# Altium PCB LP_ECG-X01.PcbDoc (part 1 of 4)
Units mm, origin at the board's own origin, x right, y up, seen from the top; angles counter-clockwise.
Board outline 54.86 x 17.53 mm, 2 copper layers (Top Layer, Bottom Layer), stack 0.141 mm thick; 98 components, 68 nets, 322 pads, 93 vias.
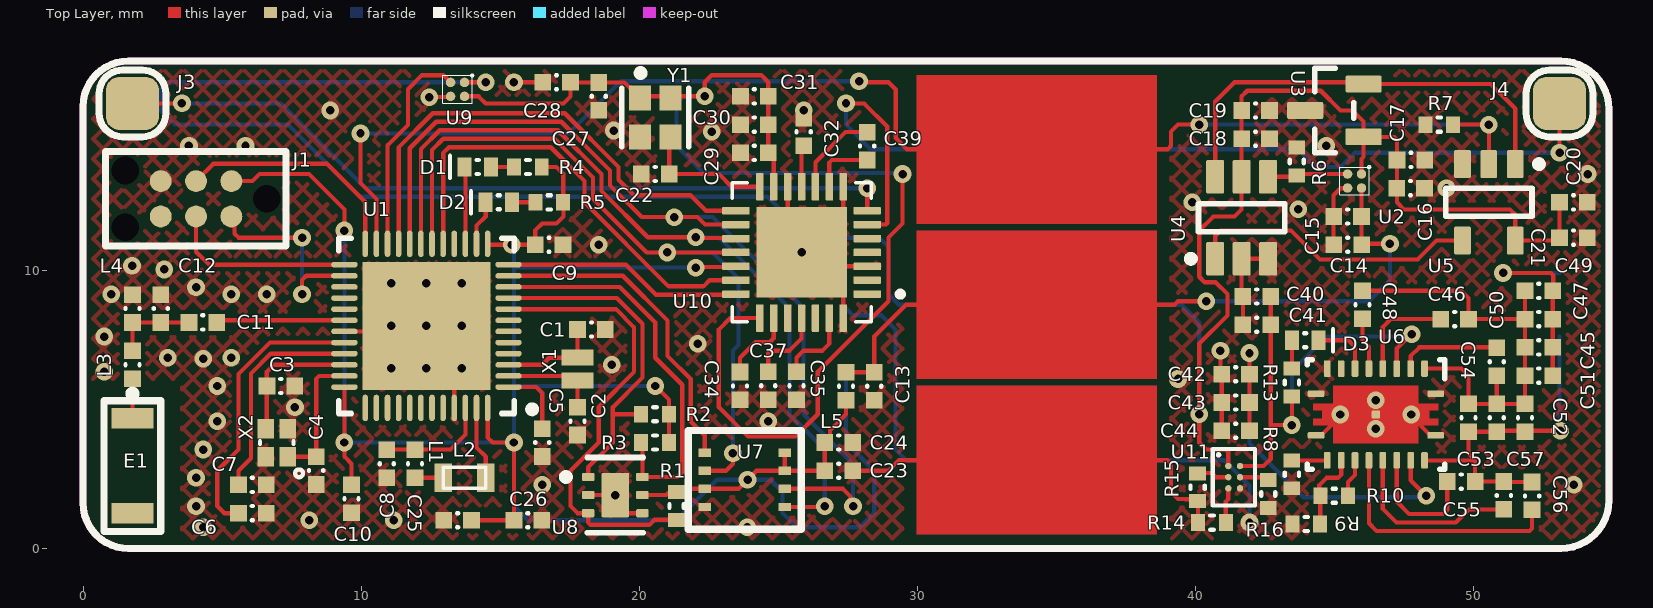
[diagram p0: Top Layer view]
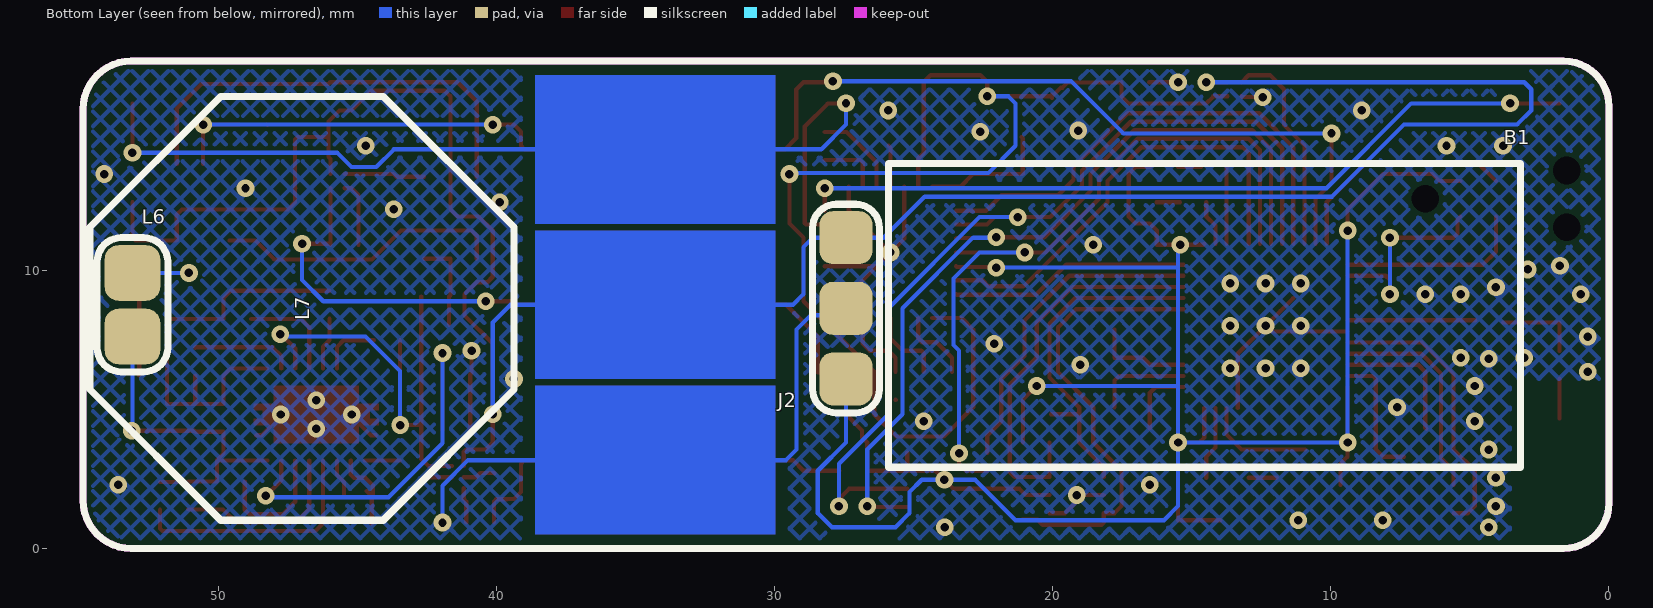
[diagram p1: Bottom Layer view, seen from below]
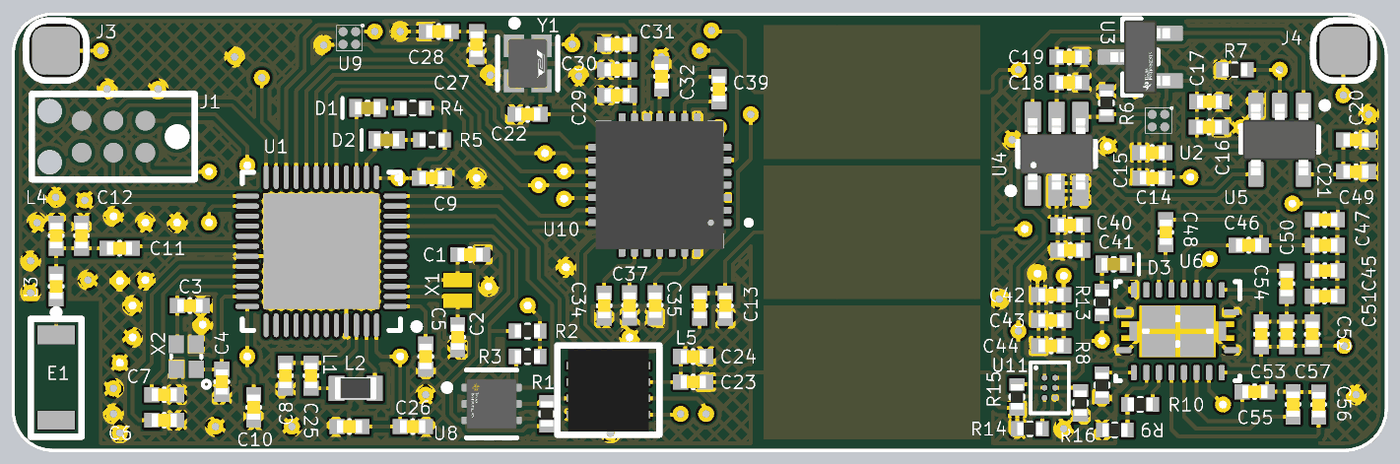
[diagram p3: 3D render of the assembled board from above, using the file's embedded part models]

## Layer stack, top to bottom
Top Solder: solder mask 0.0254, SM-001, Dk 4
Top Layer: signal copper 0.035
Dielectric 1: prepreg 0.0711, PP-006, Dk 4.1
Bottom Layer: signal copper 0.035
Bottom Solder: solder mask 0.0254, SM-001, Dk 4

## Board outline
0,1.638 0,15.888 cw(c1.638,15.888) 1.638,17.526 53.086,17.526 cw(c53.129,15.792) 54.863,15.792 54.864,15.792 54.864,1.734 cw(c53.13,1.734) 53.13,0 1.638,0 cw(c1.638,1.638)
board region "Island_2 Region": 38.859,17.526 53.086,17.526 53.259,17.53 53.601,17.47 53.924,17.343 54.216,17.155 54.464,16.912 54.659,16.626 54.794,16.306 54.863,15.966 54.864,15.792 54.864,1.734 54.864,1.564 54.797,1.229 54.667,0.913 54.477,0.629 54.235,0.387 53.951,0.197 53.635,0.067 53.3,0 53.13,0 38.927,0
board region "Island_1 Region": 29.667,0 1.638,0 1.477,0 1.16,0.063 0.862,0.186 0.594,0.366 0.366,0.594 0.186,0.862 0.063,1.16 0,1.477 0,1.638 0,15.888 0,16.049 0.063,16.366 0.186,16.664 0.366,16.932 0.594,17.16 0.862,17.34 1.16,17.463 1.477,17.526 1.638,17.526 29.455,17.526
board region "Interconnect Region": 38.927,0 29.667,0 29.455,17.526 38.859,17.526

## Design rules (kind name [scope] priority, off if disabled: settings)
Clearance [All] p1: gap=0.152 ignorepadtopadclearanceinfootprint=FALSE
ComponentClearance [All] p1: gap=0.203 collisioncheckmode=3 verticalgap=2540 showdistances=FALSE
DiffPairsRouting [All] p1: maxlimit=0.254 minlimit=0.254 mostfreqgap=0.254 substack1={09ACA8DF-FEF3-4045-BFE0-9274A49A609C} toplayer_{09aca8df-fef3-4045-bfe0-9274a49a609c}_minwidth=0.381 toplayer_{09aca8df-fef3-4045-bfe0-9274a49a609c}_maxwidth=0.381 toplayer_{09aca8df-fef3-4045-bfe0-9274a49a609c}_prefwidth=0.381 bottomlayer_{09aca8df-fef3-4045-bfe0-9274a49a609c}_minwidth=0.381 bottomlayer_{09aca8df-fef3-4045-bfe0-9274a49a609c}_maxwidth=0.381 bottomlayer_{09aca8df-fef3-4045-bfe0-9274a49a609c}_prefwidth=0.381 toplayer_minwidth=0.381 toplayer_maxwidth=0.381 toplayer_prefwidth=0.381 bottomlayer_minwidth=0.381 bottomlayer_maxwidth=0.381 bottomlayer_prefwidth=0.381 substack2={F83B83AE-013F-46B0-B20B-87D2642F3418} toplayer_{f83b83ae-013f-46b0-b20b-87d2642f3418}_minwidth=0.381 toplayer_{f83b83ae-013f-46b0-b20b-87d2642f3418}_maxwidth=0.381 toplayer_{f83b83ae-013f-46b0-b20b-87d2642f3418}_prefwidth=0.381 bottomlayer_{f83b83ae-013f-46b0-b20b-87d2642f3418}_minwidth=0.381 bottomlayer_{f83b83ae-013f-46b0-b20b-87d2642f3418}_maxwidth=0.381 bottomlayer_{f83b83ae-013f-46b0-b20b-87d2642f3418}_prefwidth=0.381 maxuncoupledlength=12.7
HoleSize [All] p1: absolutevalues=TRUE maxlimit=5.08 minlimit=0.305 maxpercent=80.000 minpercent=20.000
MinimumSolderMaskSliver [All] p1: minsoldermaskwidth=0.152
PolygonConnect [All] p1: connectstyle=Direct reliefconductorwidth=0.254 reliefentries=4 polygonreliefangle="90 Angle" airgapwidth=0.254
RoutingVias [All] p1: holewidth=0.406 width=0.762 viastyle="Through Hole" minholewidth=0.305 minwidth=0.305 maxholewidth=2.54 maxwidth=1.27
SilkToSilkClearance [All] p1: silktosilkclearance=0.152
SilkToSolderMaskClearance [IsPad] p1: minsilkscreentomaskgap=0.152 clearancetoexposedcopper=TRUE
SolderMaskExpansion [All] p1: expansion=0.102 istentingtop=FALSE
UnRoutedNet [All] p1: checkbadconnections=TRUE
Width [All] p1: maxlimit=5.08 minlimit=0.15 preferedwidth=0.152 substack1={09ACA8DF-FEF3-4045-BFE0-9274A49A609C} substack2={F83B83AE-013F-46B0-B20B-87D2642F3418}
23 further rules are at their usual default settings.

## Classes and differential pairs
component class LP_ECG_ECG-X01: C22 C23 C24 C25 C26 C27 C28 C29 C30 C31 C32 C34 C35 C37 C39 J3 J4 U7 U8 U9 U10 Y1
component class LP_ECG_Power-X01: B1 C13 C14 C15 C16 C17 C18 C19 C20 C21 C40 C41 C42 C43 C44 C45 C46 C47 C48 C49 C50 C51 C52 C53 C54 C55 C56 C57 D3 J2 L5 L6 L7 R6 R7 R8 R9 R10 R13 R14 R15 R16 U2 U3 U4 U5 U6 U11
component class LP_ECG_Main-X01: C1 C2 C3 C4 C5 C6 C7 C8 C9 C10 C11 C12 D1 D2 E1 J1 L1 L2 L3 L4 R1 R2 R3 R4 R5 U1 X1 X2

## Components (designator, comment, footprint, x,y, rotation, side; value= is the part's Value field where it differs from the comment)
B1 "40 mAh BATTERY" BATTERY 14.478,8.382 r90 bottom
C1 "14pF" C0402 18.28,7.874 r180 top
C2 "14pF" C0402 17.78,4.58 r90 top
C3 "12pF" C0402 7.112,5.842 r0 top
C4 "12pF" C0402 8.382,2.802 r270 top
C5 "100nF" C0402 16.51,3.81 r270 top
C6 "100pF" C0402 6.088,1.27 r0 top
C7 "100pF" C0402 6.088,2.286 r0 top
C8 "1uF" C0402 10.922,3.048 r90 top
C9 "4.7uF" C0402 16.756,10.922 r0 top
C10 "100nF" C0402 9.652,1.786 r270 top
C11 "0.5pF" C0402 4.31,8.128 r180 top
C12 "2pF" C0402 2.794,8.628 r90 top
C13 "4.7uF" C0402 28.448,5.834 r270 top
C14 "1uF" C0402 45.474,10.922 r180 top
C15 "100nF" C0402 45.466,11.938 r0 top
C16 "1uF" C0402 47.728,12.954 r0 top
C17 "100nF" C0402 47.744,13.97 r180 top
C18 "1uF" C0402 42.156,14.732 r0 top
C19 "100nF" C0402 42.156,15.748 r180 top
C20 "1uF" C0402 53.586,12.446 r0 top
C21 "100nF" C0402 53.586,11.176 r180 top
C22 "15pF" C0402 20.574,13.462 r180 top
C23 "1uF" C0402 27.17,2.794 r0 top
C24 "100nF" C0402 27.17,3.81 r180 top
C25 "1uF" C0402 13.47,1.016 r180 top
C26 "100nF" C0402 15.994,1.016 r180 top
C27 "1uF" C0402 18.542,16.256 r270 top
C28 "100nF" C0402 17.026,16.764 r0 top
C29 "100nF" C0402 24.138,14.224 r0 top
C30 "100nF" C0402 24.138,15.24 r0 top
C31 "10uF" C0402 24.138,16.256 r0 top
C32 "1nF" C0402 25.908,14.978 r270 top
C34 "10uF" C0402 23.622,5.842 r270 top
C35 "1uF" C0402 25.654,5.85 r270 top
C37 "10uF" C0402 24.638,5.85 r270 top
C39 "1uF" C0402 28.194,14.47 r90 top
C40 "4.7uF" C0402 42.201,9.059 r0 top
C41 "4.7uF" C0402 42.201,8.043 r0 top
C42 "100nF" C0402 41.439,6.265 r0 top
C43 "10uF" C0402 41.439,5.249 r0 top
C44 "10uF" C0402 41.439,4.233 r0 top
C45 "10nF" C0402 52.345,7.231 r180 top
C46 "470nF" C0402 49.313,8.247 r180 top
C47 "100nF" C0402 52.345,8.247 r180 top
C48 "22nF" C0402 46.003,8.763 r270 top
C49 "100nF" C0402 52.345,9.263 r180 top
C50 "10nF" C0402 50.829,6.715 r90 top
C51 "4.7nF" C0402 52.345,6.215 r180 top
C52 "2nF" C0402 51.845,4.699 r270 top
C53 "100pF" C0402 50.829,4.699 r270 top
C54 "68pF" C0402 49.813,4.699 r270 top
C55 "10nF" C0402 49.551,2.405 r180 top
C56 "22nF" C0402 52.099,1.889 r270 top
C57 "470nF" C0402 51.083,1.905 r270 top
D1 "Orange" LED_0402 14.191,13.716 r180 top
D2 "Red" LED_0402 14.953,12.446 r180 top
D3 "Yellow" LED_0402 43.938,7.485 r0 top
E1 "2450AT18B100" 2450AT18B100 1.778,4.676 r270 top
J1 "J-LINK 6-PIN NEEDLE ADAPTER" "J-LINK 6 PIN NEEDLE" 6.604,12.573 r180 top
J2 "SMD CONNECTOR FOR 40 mAh BATTERY" BATTERY_CONNECTOR 27.432,11.176 r270 bottom
J3 "ECG_SMD_CONNECTOR" ECG_CONNECTOR 1.778,16.002 r0 top
J4 "ECG_SMD_CONNECTOR" ECG_CONNECTOR 53.086,16.002 r0 top
L1 "15nH" L0402 11.938,3.048 r270 top
L2 "10uH" L0603 13.716,2.54 r0 top
L3 "9nH" L0402 1.778,6.604 r270 top
L4 "2nH" L0402 1.778,8.628 r270 top
L5 "1uH" L0402 27.432,5.834 r270 top
L6 "WIRELESS CHARGING COIL, RECEIVER" 760308101219 53.086,7.62 r0 bottom
L7 "WIRELESS CHARGING COIL, RECEIVER" "760308101219 - PHYSICAL MODEL" 46.99,8.636 r90 bottom
R1 "10kR" R0402 21.336,1.524 r270 top
R2 "10kR" R0402 20.566,4.826 r180 top
R3 "10kR" R0402 20.566,3.81 r180 top
R4 "422R" R0402 15.994,13.716 r180 top
R5 "422R" R0402 16.764,12.446 r180 top
R6 "1MR" R0402 43.639,13.913 r90 top
R7 "1MR" R0402 48.76,15.24 r0 top
R8 "2kR" R0402 43.463,2.667 r270 top
R9 "10kR" R0402 43.979,0.881 r180 top
R10 "20kR" R0402 44.987,1.897 r180 top
R13 "464R" R0402 43.463,5.969 r270 top
R14 "10kR" R0402 40.589,0.931 r0 top
R15 "10kR" R0402 40.073,2.201 r90 top
R16 "3.3kR" R0402 42.613,1.955 r90 top
U1 "NRF52832-QFAA-R7" NRF52832-QFAA-R7 12.348,8.004 r0 top
U2 "ADP160" ADP160 45.716,13.212 r270 top
U3 "DRV5032FBDBZR" FP-DBZ0003A-MFG 44.992,15.748 r180 top
U4 "SN74LVC1G57DBVR" DBV0006A_M 41.656,11.889 r90 top
U5 "SN74LVC1G80DBVR" DBV0005A_N 50.546,12.446 r270 top
U6 "BQ51013BRHLR" BQ51013BRHLR 46.483,4.817 r180 top
U7 "8 MB FRAM" GQFN-8 23.792,2.469 r0 top
U8 "TMP117AIDRVR" TMP117AIDRVR 19.136,1.92 r270 top
U9 "ADP160" ADP160 13.466,16.506 r270 top
U10 "MAX30003CTI+" QFN50P500X500X80-29N 25.834,10.644 r180 top
U11 "BQ25100YFPT" YZP0006 41.377,2.563 r0 top
X1 "32.768 kHz" CRYSTAL_1MM2_X_1MM0 17.78,6.448 r270 top
X2 "32MHz" CRYSTAL_1MM6_X_1MM2 6.966,3.802 r90 top
Y1 "OSCILLATOR-32.768KHZ" OSCILLATOR_4-SMD 20.574,15.494 r270 top

## Footprints (in the part's own frame and the unit in brackets; to place one, negate y for a bottom-side part, rotate by r counter-clockwise, add the part's x,y. Pads: shape width x height; smd on the part's side, far side on the other; paste and mask are expansions set on the pad)
2450AT18B100 [mm] "2.4GHz Mini Antenna SMD, 50 ohm Resistence"
  rect 0.74x1.5 smd mask+0.03: 1(0,0) 2(3.406,0)
  silkscreen extent -1.02,-1.02 4.06,1.02, body extent -0.05,-0.9 3.35,0.9, height 1.4
760308101219 [mm] "WE-WPCC WIRELESS POWER TRANSFER RECEIVER COIL"
  rrect50% 2x2 smd: 1(0,0) 2(0,-2.286)
  silkscreen extent -1.27,-3.56 1.27,1.27
"760308101219 - PHYSICAL MODEL" [mm] "Wurth Wireless Inductive Coil"
  silkscreen extent -7.62,-7.62 7.62,7.62, body extent -7.5,-7.5 7.5,7.5, height 0.98
ADP160 [mm] "4-Ball WLCSP, CB-4-4"
  round 0.34 smd paste+0.01 mask+0.01: A1(-0.25,0.25) A2(0.25,0.25) B1(-0.25,-0.25) B2(0.25,-0.25)
  silkscreen extent -0.55,-0.53 0.5,0.58, body extent -0.48,-0.48 0.48,0.48, height 0.69
BATTERY [mm]
  silkscreen extent -5.46,-11.3 5.46,11.43, body extent -5,-10.87 5,11.13, height 3
BATTERY_CONNECTOR [mm] "SMD Battery connector"
  rrect50% 1.905x1.905 smd: 1(0,0) 2(2.54,0) 3(5.08,0)
  silkscreen extent -1.2,-1.2 6.3,1.2
BQ51013BRHLR [mm]
  rrect42% 0.6x0.24 smd: 1(-2.15,-0.75) 10(2.15,-0.75) 11(2.15,0.75) 20(-2.15,0.75)
  rrect42% 0.24x0.6 smd: 2(-1.75,-1.65) 3(-1.25,-1.65) 4(-0.75,-1.65) 5(-0.25,-1.65) 6(0.25,-1.65) 7(0.75,-1.65) 8(1.25,-1.65) 9(1.75,-1.65) 12(1.75,1.65) 13(1.25,1.65) 14(0.75,1.65) 15(0.25,1.65) 16(-0.25,1.65) 17(-0.75,1.65) 18(-1.25,1.65) 19(-1.75,1.65)
  rrect33% 0.3x0.3 smd paste-0.15 mask+0: 21(0,0)
  Top Layer region: -2.25,0.16 -1.925,0.16 -1.925,-0.16 -2.25,-0.16 -2.25,-0.39 -1.525,-0.39 -1.525,-1.025 1.525,-1.025 1.525,-0.39 2.25,-0.39 2.25,-0.16 1.925,-0.16 1.925,0.16 2.25,0.16 2.25,0.39 1.525,0.39 1.525,1.025 -1.525,1.025 -1.525,0.39 -2.25,0.39
  silkscreen extent -2.47,-1.98 2.47,1.97, body extent -2.32,-1.83 2.33,1.83, height 1.01
C0402 [mm]
  rect 0.6x0.6 smd: 1(-0.5,0) 2(0.5,0)
  silkscreen extent -0.02,-0.25 0.02,0.25, body extent -0.5,-0.25 0.5,0.25, height 0.55
CRYSTAL_1MM2_X_1MM0 [mm] "Crystal 1.2 x 1.0 x 0.35mm"
  rect 0.575x1.14 smd paste-0.5 mask+0.06: 1(-0.41,0) 2(0.41,0)
  body extent -0.6,-0.5 0.6,0.5, height 0.35
CRYSTAL_1MM6_X_1MM2 [mm] "1.6 x 1.2 x 0.35mm 4-pin crystal"
  rect 0.7x0.6 smd mask+0.036: 1(-0.5,-0.4) 2(0.5,-0.4) 3(0.5,0.4) 4(-0.5,0.4)
  silkscreen extent -1.24,-0.94 0.05,0.6, body extent -0.8,-0.6 0.8,0.6, height 0.35
DBV0005A_N [mm] "SOT23, 5-Leads, Body 3.05x1.75mm, Pitch 0.95mm, IPC Medium Density"
  rrect17% 1x0.6 smd: 1(-1.375,0.95) 2(-1.375,0) 3(-1.375,-0.95) 4(1.375,-0.95) 5(1.375,0.95)
  silkscreen extent -1.5,-1.55 0.5,1.93, body extent -1.42,-1.46 1.42,1.46, height 1.08
DBV0006A_M [mm] "SOT23, 6-Leads, Body 3.05x1.75mm, Pitch 0.95mm, IPC Low Density"
  rrect15% 1.2x0.65 smd: 1(-1.475,0.95) 2(-1.475,0) 3(-1.475,-0.95) 4(1.475,-0.95) 5(1.475,0) 6(1.475,0.95)
  silkscreen extent -1.6,-1.55 0.5,1.95, body extent -1.42,-1.46 1.42,1.46, height 1.11
ECG_CONNECTOR [mm] "Surface Mount ECG Connector"
  rrect50% 1.905x1.905 smd: 1(0,0)
  silkscreen extent -1.2,-1.2 1.2,1.2
FP-DBZ0003A-MFG [mm]
  rrect17% 1.3x0.6 smd paste+0 mask+0: 1(-1.05,0.95) 2(-1.05,-0.95) 3(1.05,0)
  silkscreen extent -0.7,-1.52 0.7,1.52, body extent -1.8,-1.62 1.8,1.62, height 0.25
GQFN-8 [mm] "3.23MM X 3.28MM X 0.5MM"
  rect 0.45x0.3 smd: 1(-1.44,0.975) 2(-1.44,0.325) 3(-1.44,-0.325) 4(-1.44,-0.975) 5(1.44,-0.975) 6(1.44,-0.325) 7(1.44,0.325) 8(1.44,0.975)
  silkscreen extent -2.03,-1.78 2.03,1.78, body extent -1.61,-1.64 1.62,1.64, height 0.5
"J-LINK 6 PIN NEEDLE" [mil] "J-LINK 6 PIN NEEDLE ADAPTER"
  round 30.98 smd mask+0: 1(50,-25) 2(50,25) 3(100,-25) 4(100,25) 5(150,-25) 6(150,25)
  round 0 hole 39.02 unplated mask+0: 7(0,0) 7(200,-40) 7(200,40)
  silkscreen extent -28,-67 228,67
L0402 [mm]
  rect 0.6x0.6 smd: 1(-0.5,0) 2(0.5,0)
  silkscreen extent -0.02,-0.25 0.02,0.25, body extent -0.5,-0.25 0.5,0.25, height 0.55
L0603 [mil] "surface mount inductor 0603"
  rect 25x40 smd: 1(-30,0) 2(30,0)
  silkscreen extent -30,-15 30,15, body extent -31,-16 32,16, height 39
LED_0402 [mm] "0402 w/ LED mark"
  rect 0.5x0.7 smd: A(-0.475,0) K(0.475,0)
  silkscreen extent -0.04,-0.4 1,0.4, body extent -0.5,-0.25 0.5,0.25, height 0.35
NRF52832-QFAA-R7 [mm]
  oval 0.95x0.2 smd: 1(2.95,-2.2) 2(2.95,-1.8) 3(2.95,-1.4) 4(2.95,-1) 5(2.95,-0.6) 6(2.95,-0.2) 7(2.95,0.2) 8(2.95,0.6) 9(2.95,1) 10(2.95,1.4) 11(2.95,1.8) 12(2.95,2.2) 25(-2.95,2.2) 26(-2.95,1.8) 27(-2.95,1.4) 28(-2.95,1) 29(-2.95,0.6) 30(-2.95,0.2) 31(-2.95,-0.2) 32(-2.95,-0.6) 33(-2.95,-1) 34(-2.95,-1.4) 35(-2.95,-1.8) 36(-2.95,-2.2)
  oval 0.2x0.95 smd: 13(2.2,2.95) 14(1.8,2.95) 15(1.4,2.95) 16(1,2.95) 17(0.6,2.95) 18(0.2,2.95) 19(-0.2,2.95) 20(-0.6,2.95) 21(-1,2.95) 22(-1.4,2.95) 23(-1.8,2.95) 24(-2.2,2.95) 37(-2.2,-2.95) 38(-1.8,-2.95) 39(-1.4,-2.95) 40(-1,-2.95) 41(-0.6,-2.95) 42(-0.2,-2.95) 43(0.2,-2.95) 44(0.6,-2.95) 45(1,-2.95) 46(1.4,-2.95) 47(1.8,-2.95) 48(2.2,-2.95)
  rect 4.6x4.6 smd: 49(0,0)
  silkscreen extent -3.15,-3.15 3.92,3.15, body extent -3,-3 3,3, height 0.9
OSCILLATOR_4-SMD [mm] "2.0 MM X 1.6 MM X 0.75 MM, 4-SMD"
  rect 0.9x0.8 smd paste+0 mask+0: 1(-0.7,-0.55) 2(0.7,-0.55) 3(0.7,0.55) 4(-0.7,0.55)
  silkscreen extent -1.72,-1.2 1.05,1.2, body extent -1.15,-0.95 1.15,0.95, height 0.25
QFN50P500X500X80-29N [mm]
  rrect25% 0.99x0.27 smd: 1(-2.36,1.5) 2(-2.36,1) 3(-2.36,0.5) 4(-2.36,0) 5(-2.36,-0.5) 6(-2.36,-1) 7(-2.36,-1.5) 15(2.36,-1.5) 16(2.36,-1) 17(2.36,-0.5) 18(2.36,0) 19(2.36,0.5) 20(2.36,1) 21(2.36,1.5)
  rrect25% 0.27x0.99 smd: 8(-1.5,-2.36) 9(-1,-2.36) 10(-0.5,-2.36) 11(0,-2.36) 12(0.5,-2.36) 13(1,-2.36) 14(1.5,-2.36) 22(1.5,2.36) 23(1,2.36) 24(0.5,2.36) 25(0,2.36) 26(-0.5,2.36) 27(-1,2.36) 28(-1.5,2.36)
  rect 3.25x3.25 smd paste-3: 29(0,0)
  silkscreen extent -3.65,-2.5 2.5,2.5, body extent -2.55,-2.55 2.55,2.55, height 0.81
R0402 [mm]
  rect 0.5x0.6 smd: 1(-0.5,0) 2(0.5,0)
  silkscreen extent -0.06,-0.25 0.06,0.25, body extent -0.5,-0.25 0.5,0.25, height 0.35
TMP117AIDRVR [mm]
  rrect33% 0.3x0.45 smd paste+0 mask+0: 1(-0.65,-0.975) 2(0,-0.975) 3(0.65,-0.975) 4(0.65,0.975) 5(0,0.975) 6(-0.65,0.975)
  rrect10% 1.6x1 smd paste-1000 mask+0: 7(0,0)
  silkscreen extent -1.35,-1.9 1.35,1, body extent -1.15,-1.3 1.15,1.3, height 0.25
YZP0006 [mm] "BGA, 6-Balls, Body 1.388x0.888mm, Pitch 0.4mm"
  round 0.23 smd mask+0.05: A1(-0.2,0.4) A2(0.22,0.4) B1(-0.2,0) B2(0.22,0) C1(-0.2,-0.4) C2(0.22,-0.4)
  silkscreen extent -0.76,-1.02 0.76,1.02, body extent -0.45,-0.69 0.45,0.69, height 0.5

## Part data
B1: library part BATTERY, "Lithium Battery 3.7V 40mAh Rechargeable", Capacity=40mAh, Manufacturer=SparkFun, Manufacturer Part Number=PRT-13852, Supplier Part Number 1=1568-1496-ND, Voltage Rating=3.7V, ComponentLink1Description=http://cdn.sparkfun.com/datasheets/Prototyping/SPE-00-301120-40mah-en-1.0ver.pdf?src-supplier=Digi-Key, ComponentLink1URL=http://cdn.sparkfun.com/datasheets/Prototyping/SPE-00-301120-40mah-en-1.0ver.pdf?src-supplier=Digi-Key, Pricing 1="1=4.50000 (USD)", RoHS=No, Stock 1=237, Supplier 1=Digi-Key, Termination=Connector, Weight=5g
C1 C2: library part C-0402(1005), "Ceramic Capacitor, Multilayer, Ceramic, 50V, 1% +Tol, 1% -Tol, C0G, 30ppm/Cel TC, 0.000014uF, Surface Mount, 0402", Case Code (Imperial)=0402, Case Code (Metric)=1005, Dielectric=C0G, Manufacturer="Kyocera AVX", Manufacturer Part Number=04025U140FAT2A, Max Operating Temperature=125°C, Min Operating Temperature=-55°C, Package Quantity=10000, Supplier Part Number 1=478-10139-1-ND, Tolerance=1%, Voltage Rating=50V, Capacitance=14pF, Case/Package=0402, Category="Ceramic Capacitors", ComponentLink1Description=https://datasheet.ciiva.com/169/product-169683.pdf, ComponentLink1URL=https://datasheet.ciiva.com/169/product-169683.pdf, ComponentLink2Description=https://datasheet.ciiva.com:443/pdfs/VipMasterIC/IC/AVXC/AVXC-S-A0001948465/AVXC-S-A0001948465-1.pdf?src-supplier=IHS+Markit, ComponentLink2URL=https://datasheet.ciiva.com:443/pdfs/VipMasterIC/IC/AVXC/AVXC-S-A0001948465/AVXC-S-A0001948465-1.pdf?src-supplier=IHS+Markit, ComponentLink3Description=https://datasheet.ciiva.com/6269/useries-6269558.pdf?src-supplier=Digi-Key, ComponentLink3URL=https://datasheet.ciiva.com/6269/useries-6269558.pdf?src-supplier=Digi-Key, ComponentLink4Description=https://datasheet.ciiva.com/11568/useries-11568551.pdf?src-supplier=Avnet, ComponentLink4URL=https://datasheet.ciiva.com/11568/useries-11568551.pdf?src-supplier=Avnet, Composition=Ceramic, Depth=0.5mm, Length=1mm, Mount="Surface Mount", Packaging="Tape and Reel", Pricing 1="1=0.35000, 10=0.24100, 100=0.14460, 500=0.10846, 1000=0.09158, 2500=0.08676, 5000=0.08194 (USD)", Radiation Hardening=No, RoHS=Yes, Stock 1=25036, Supplier 1=Digi-Key, Termination=SMD/SMT, Thickness=0.022inch, Voltage Rating (DC)=50V, Width=0.5mm
C3 C4: library part C-0402(1005), "Ceramic Capacitor, Multilayer, Ceramic, 50V, 1% +Tol, 1% -Tol, C0G, 30ppm/Cel TC, 0.000012uF, Surface Mount, 0402", Case Code (Imperial)=0402, Case Code (Metric)=1005, Dielectric=C0G, Manufacturer="Kyocera AVX", Manufacturer Part Number=04025U120FAT2A, Max Operating Temperature=125°C, Min Operating Temperature=-55°C, Package Quantity=10000, Supplier Part Number 1=478-10136-1-ND, Tolerance=1%, Voltage Rating=50V, Capacitance=12pF, Case/Package=0402, Category="Ceramic Capacitors", ComponentLink1Description=https://datasheet.ciiva.com/169/product-169683.pdf, ComponentLink1URL=https://datasheet.ciiva.com/169/product-169683.pdf, ComponentLink2Description=https://datasheet.ciiva.com:443/pdfs/VipMasterIC/IC/AVXC/AVXC-S-A0008668660/AVXC-S-A0008668660-1.pdf?src-supplier=IHS+Markit, ComponentLink2URL=https://datasheet.ciiva.com:443/pdfs/VipMasterIC/IC/AVXC/AVXC-S-A0008668660/AVXC-S-A0008668660-1.pdf?src-supplier=IHS+Markit, ComponentLink3Description=https://datasheet.ciiva.com/16327/useries-16327642.pdf?src-supplier=Future+Electronics, ComponentLink3URL=https://datasheet.ciiva.com/16327/useries-16327642.pdf?src-supplier=Future+Electronics, ComponentLink4Description=https://datasheet.ciiva.com/11568/useries-11568940.pdf?src-supplier=Avnet, ComponentLink4URL=https://datasheet.ciiva.com/11568/useries-11568940.pdf?src-supplier=Avnet, Composition=Ceramic, Depth=0.5mm, Height=0.02mm, Lead Free="Lead Free", Length=1mm, Mount="Surface Mount", Packaging="Tape and Reel", Pricing 1="1=0.33000, 10=0.22700, 100=0.13630, 500=0.10220, 1000=0.08630, 2500=0.08176, 5000=0.07721 (USD)", Radiation Hardening=No, RoHS=Yes, Stock 1=30880, Supplier 1=Digi-Key, Termination=SMD/SMT, Thickness=0.022inch, Voltage Rating (DC)=50V, Weight=2.3E-05oz, Width=0.02inch
C5 C15 C17 C19 C21 C24 C26 C28 C47 C49: library part C-0402(1005), "Ceramic Capacitor, Multilayer, Ceramic, 25V, 10% +Tol, 10% -Tol, X5R, 15% TC, 0.1uF, Surface Mount, 0402", Case Code (Imperial)=0402, Case Code (Metric)=1005, Dielectric=X5R, Manufacturer="Taiyo Yuden", Manufacturer Part Number=TMK105BJ104KV-F, Max Operating Temperature=85°C, Min Operating Temperature=-55°C, Package Quantity=1, Supplier Part Number 1=587-1456-1-ND, Tolerance=10%, Voltage=25V, Capacitance=100nF, Case/Package=0402, Category="Ceramic Capacitors", ComponentLink1Description=https://datasheet.ciiva.com/169/product-169683.pdf, ComponentLink1URL=https://datasheet.ciiva.com/169/product-169683.pdf, ComponentLink2Description=https://datasheet.ciiva.com:443/pdfs/VipMasterIC/IC/TAIY/TAIY-S-A0009103435/TAIY-S-A0009103038-1.pdf?src-supplier=IHS+Markit, ComponentLink2URL=https://datasheet.ciiva.com:443/pdfs/VipMasterIC/IC/TAIY/TAIY-S-A0009103435/TAIY-S-A0009103038-1.pdf?src-supplier=IHS+Markit, ComponentLink3Description=https://datasheet.ciiva.com/30051/25tmk105bj104kv-f-30051094.pdf?src-supplier=Onlinecomponents.com, ComponentLink3URL=https://datasheet.ciiva.com/30051/25tmk105bj104kv-f-30051094.pdf?src-supplier=Onlinecomponents.com, ComponentLink4Description=https://datasheet.ciiva.com/15922/28tmk105bj104kv-f-15922315.pdf?src-supplier=Onlinecomponents.com, ComponentLink4URL=https://datasheet.ciiva.com/15922/28tmk105bj104kv-f-15922315.pdf?src-supplier=Onlinecomponents.com, ComponentLink5Description=https://datasheet.ciiva.com/131/tmk105bj104kv-f-ss-131420.pdf?src-supplier=Digi-Key, ComponentLink5URL=https://datasheet.ciiva.com/131/tmk105bj104kv-f-ss-131420.pdf?src-supplier=Digi-Key, ComponentLink6Description=https://datasheet.ciiva.com/22768/1693457-22768649.pdf?src-supplier=Farnell, ComponentLink6URL=https://datasheet.ciiva.com/22768/1693457-22768649.pdf?src-supplier=Farnell, Composition=Ceramic, Depth=0.5mm, Halogen Free="Halogen Free", Height=0.5mm, Lead Free="Lead Free", Length=1mm, Mount="Surface Mount", Number of Pins=2, Packaging="Tape and Reel", Pricing 1="1=0.10000, 10=0.04600, 100=0.02050, 500=0.01464, 1000=0.01150, 2500=0.01045, 5000=0.00961 (USD)", REACH SVHC="No SVHC", RoHS=Yes, Stock 1=27456801, Supplier 1=Digi-Key, Termination=SMD/SMT, Thickness=0.022inch, Voltage Rating=25V, Voltage Rating (DC)=25V, Weight=2.3E-05oz, Width=0.5mm
C6 C7: library part C-0402(1005), "Ceramic Capacitor, Multilayer, Ceramic, 50V, 1% +Tol, 1% -Tol, C0G, 30ppm/Cel TC, 0.0001uF, Surface Mount, 0402", Case Code (Imperial)=0402, Case Code (Metric)=1005, Dielectric=C0G, Manufacturer=Yageo, Manufacturer Part Number=CC0402FRNPO9BN101, Max Operating Temperature=125°C, Min Operating Temperature=-55°C, Package Quantity=10000, Supplier Part Number 1=311-3329-1-ND, Tolerance=1%, Voltage Rating=50V, Capacitance=100pF, Case/Package=0402, Category="Ceramic Capacitors", ComponentLink1Description=https://datasheet.ciiva.com/169/product-169683.pdf, ComponentLink1URL=https://datasheet.ciiva.com/169/product-169683.pdf, ComponentLink2Description=https://datasheet.ciiva.com:443/pdfs/VipMasterIC/IC/YAGO/YAGO-S-A0009251638/YAGO-S-A0009251638-1.pdf?src-supplier=IHS+Markit, ComponentLink2URL=https://datasheet.ciiva.com:443/pdfs/VipMasterIC/IC/YAGO/YAGO-S-A0009251638/YAGO-S-A0009251638-1.pdf?src-supplier=IHS+Markit, ComponentLink3Description=http://www.mouser.com/ds/2/447/Yageo_UPY-GP_NP0_16V-to-50V_9-358835.pdf?src-supplier=Mouser, ComponentLink3URL=http://www.mouser.com/ds/2/447/Yageo_UPY-GP_NP0_16V-to-50V_9-358835.pdf?src-supplier=Mouser, ComponentLink4Description=http://components.arrow.com/part/dataview/0323_00775990?src-supplier=Arrow+Europe, ComponentLink4URL=http://components.arrow.com/part/dataview/0323_00775990?src-supplier=Arrow+Europe, ComponentLink5Description=http://www.yageo.com/NewPortal/yageodocoutput?fileName=/pdf/MLCC/UPY-GP_NP0_16V-to-50V_14.pdf&src-supplier=Digi-Key, ComponentLink5URL=http://www.yageo.com/NewPortal/yageodocoutput?fileName=/pdf/MLCC/UPY-GP_NP0_16V-to-50V_14.pdf&src-supplier=Digi-Key, ComponentLink6Description=http://www.yageo.com/documents/recent/UPY-GP_NP0_16V-to-50V_16.pdf?src-supplier=Digi-Key, ComponentLink6URL=http://www.yageo.com/documents/recent/UPY-GP_NP0_16V-to-50V_16.pdf?src-supplier=Digi-Key, ComponentLink7Description=http://www.yageo.com/documents/recent/UPY-GP_NP0_16V-to-50V_9.pdf?src-supplier=Future+Electronics, ComponentLink7URL=http://www.yageo.com/documents/recent/UPY-GP_NP0_16V-to-50V_9.pdf?src-supplier=Future+Electronics, Composition=Ceramic, Depth=0.5mm, Lead Free="Lead Free", Length=1mm, Mount="Surface Mount", Packaging="Tape and Reel", Pricing 1="1=0.11000, 10=0.08200, 100=0.03840, 500=0.02690, 1000=0.02228, 2500=0.02073, 5000=0.01897 (USD)", RoHS=Yes, Stock 1=22812, Supplier 1=Digi-Key, Termination=SMD/SMT, Thickness=0.022inch, Voltage Rating (DC)=50V, Width=0.02inch
C8 C14 C16 C18 C20 C23 C25 C27 C35 C39: library part C-0402(1005), "Ceramic Capacitor, Multilayer, Ceramic, 6.3V, 20% +Tol, 20% -Tol, X5R, 15% TC, 1uF, Surface Mount, 0402", Case Code (Imperial)=0402, Case Code (Metric)=1005, Dielectric=X5R, Manufacturer=Yageo, Manufacturer Part Number=CC0402MRX5R5BB105, Max Operating Temperature=85°C, Min Operating Temperature=-55°C, Package Quantity=1, Supplier Part Number 1=311-1441-1-ND, Tolerance=20%, Voltage Rating=6.3V, Capacitance=1uF, Case/Package=0402, Category="Ceramic Capacitors", ComponentLink1Description=https://datasheet.ciiva.com/169/product-169683.pdf, ComponentLink1URL=https://datasheet.ciiva.com/169/product-169683.pdf, ComponentLink2Description=https://datasheet.ciiva.com:443/pdfs/VipMasterIC/IC/YAGO/YAGO-S-A0006851646/YAGO-S-A0006851646-1.pdf?src-supplier=IHS+Markit, ComponentLink2URL=https://datasheet.ciiva.com:443/pdfs/VipMasterIC/IC/YAGO/YAGO-S-A0006851646/YAGO-S-A0006851646-1.pdf?src-supplier=IHS+Markit, ComponentLink3Description=https://datasheet.ciiva.com/176/mlccorderingcode-176806.pdf?src-supplier=Digi-Key, ComponentLink3URL=https://datasheet.ciiva.com/176/mlccorderingcode-176806.pdf?src-supplier=Digi-Key, ComponentLink4Description=https://datasheet.ciiva.com/176/mlccorderingcode-176807.pdf?src-supplier=Digi-Key, ComponentLink4URL=https://datasheet.ciiva.com/176/mlccorderingcode-176807.pdf?src-supplier=Digi-Key, ComponentLink5Description=https://datasheet.ciiva.com/176/mlccorderingcode-176808.pdf?src-supplier=Digi-Key, ComponentLink5URL=https://datasheet.ciiva.com/176/mlccorderingcode-176808.pdf?src-supplier=Digi-Key, Composition=Ceramic, Depth=0.5mm, Dissipation Factor=10%, Halogen Free="Halogen Free", Height=0.5mm, Lead Free="Lead Free", Length=1mm, Mount="Surface Mount", Number of Pins=2, Packaging="Tape and Reel", Pricing 1="1=0.13000, 10=0.08900, 100=0.04200, 500=0.02946, 1000=0.02439, 2500=0.02270, 5000=0.02076 (USD)", RoHS=Yes, Stock 1=16697, Supplier 1=Digi-Key, Termination=SMD/SMT, Thickness=0.022inch, Voltage Rating (DC)=6.3V, Width=0.5mm
C9 C13 C40 C41: library part C-0402(1005), "0402 10 V 4.7 uF ±20% Tolerance X5R Multilayer Ceramic Chip Capacitor", Case Code (Imperial)=0402, Case Code (Metric)=1005, Manufacturer=Murata, Manufacturer Part Number=GRM155R61A475MEAAD, Max Operating Temperature=85°C, Min Operating Temperature=-55°C, Supplier Part Number 1=490-14306-1-ND, Tolerance=20%, Voltage Rating=10V, Capacitance=4.7uF, Case/Package=0402, Category="Ceramic Capacitors", ComponentLink1Description=https://datasheet.ciiva.com/169/product-169683.pdf, ComponentLink1URL=https://datasheet.ciiva.com/169/product-169683.pdf, ComponentLink2Description=https://psearch.en.murata.com:443/capacitor/product/GRM155R61A475MEAA%23.pdf?src-supplier=IHS+Markit, ComponentLink2URL=https://psearch.en.murata.com:443/capacitor/product/GRM155R61A475MEAA%23.pdf?src-supplier=IHS+Markit, ComponentLink3Description=http://www.farnell.com/datasheets/2189109.pdf?src-supplier=Farnell, ComponentLink3URL=http://www.farnell.com/datasheets/2189109.pdf?src-supplier=Farnell, ComponentLink4Description=https://search.murata.co.jp/Ceramy/image/img/A01X/G101/ENG/GRM155R61A475MEAA-01.pdf?src-supplier=Digi-Key, ComponentLink4URL=https://search.murata.co.jp/Ceramy/image/img/A01X/G101/ENG/GRM155R61A475MEAA-01.pdf?src-supplier=Digi-Key, ComponentLink5Description=http://www.farnell.com/datasheets/2189109.pdf?src-supplier=Element14, ComponentLink5URL=http://www.farnell.com/datasheets/2189109.pdf?src-supplier=Element14, ComponentLink6Description=http://www.farnell.com/datasheets/2189109.pdf?src-supplier=Newark, ComponentLink6URL=http://www.farnell.com/datasheets/2189109.pdf?src-supplier=Newark, ComponentLink7Description=http://datasheet.octopart.com/GRM155R61A475MEAAD-Murata-datasheet-138740730.pdf?src-supplier=Ciiva+Crawler, ComponentLink7URL=http://datasheet.octopart.com/GRM155R61A475MEAAD-Murata-datasheet-138740730.pdf?src-supplier=Ciiva+Crawler, ComponentLink8Description=http://datasheet.octopart.com/GRM155R61A475MEAAD-Murata-datasheet-140690084.pdf?src-supplier=Ciiva+Crawler, ComponentLink8URL=http://datasheet.octopart.com/GRM155R61A475MEAAD-Murata-datasheet-140690084.pdf?src-supplier=Ciiva+Crawler, ComponentLink9Description=http://datasheet.octopart.com/GRM155R61A475MEAAD-Murata-datasheet-68589269.pdf?src-supplier=Newark, ComponentLink9URL=http://datasheet.octopart.com/GRM155R61A475MEAAD-Murata-datasheet-68589269.pdf?src-supplier=Newark, ComponentLink10Description=http://datasheet.octopart.com/GRM155R61A475MEAAD-Murata-datasheet-8819587.pdf, ComponentLink10URL=http://datasheet.octopart.com/GRM155R61A475MEAAD-Murata-datasheet-8819587.pdf, ComponentLink11Description=http://datasheet.octopart.com/GRM155R61A475MEAAD-Murata-datasheet-10025737.pdf, ComponentLink11URL=http://datasheet.octopart.com/GRM155R61A475MEAAD-Murata-datasheet-10025737.pdf, ComponentLink12Description=http://datasheet.octopart.com/GRM155R61A475MEAAD-Murata-datasheet-11978611.pdf, ComponentLink12URL=http://datasheet.octopart.com/GRM155R61A475MEAAD-Murata-datasheet-11978611.pdf, ComponentLink13Description=http://datasheet.octopart.com/GRM155R61A475MEAAD-Murata-datasheet-12510076.pdf, ComponentLink13URL=http://datasheet.octopart.com/GRM155R61A475MEAAD-Murata-datasheet-12510076.pdf, ComponentLink14Description=http://datasheet.octopart.com/GRM155R61A475MEAAD-Murata-datasheet-12515295.pdf, ComponentLink14URL=http://datasheet.octopart.com/GRM155R61A475MEAAD-Murata-datasheet-12515295.pdf, Mount="Surface Mount", Packaging="Tape and Reel", Pricing 1="1=0.25000, 10=0.16900, 100=0.08560, 500=0.05854, 1000=0.05179, 2500=0.04954, 5000=0.04503 (USD)", Stock 1=420733, Supplier 1=Digi-Key
C10 C29 C30 C42: library part C-0402(1005), "Ceramic Capacitor, Multilayer, Ceramic, 25V, 10% +Tol, 10% -Tol, X5R, 15% TC, 0.1uF, Surface Mount, 0402", Capacitor Type=Ceramic, Manufacturer="Taiyo Yuden", Manufacturer Part Number=TMK105BJ104KV-F, Max Operating Temperature=85°C, Min Operating Temperature=-55°C, Negative Tolerance=10%, Package Shape=Rectangular, Package Style=SMTMeter, Rated DC Voltage (URdc)=25V, Supplier Part Number 1=587-1456-1-ND, Temperature Characteristics Code=X5R, Capacitance=100nF, Category="Ceramic Capacitors", ComponentLink1Description=https://datasheet.ciiva.com/169/product-169683.pdf, ComponentLink1URL=https://datasheet.ciiva.com/169/product-169683.pdf, ComponentLink2Description=https://datasheet.ciiva.com:443/pdfs/VipMasterIC/IC/TAIY/TAIY-S-A0009103435/TAIY-S-A0009103038-1.pdf?src-supplier=IHS+Markit, ComponentLink2URL=https://datasheet.ciiva.com:443/pdfs/VipMasterIC/IC/TAIY/TAIY-S-A0009103435/TAIY-S-A0009103038-1.pdf?src-supplier=IHS+Markit, ComponentLink3Description=https://datasheet.ciiva.com/30051/25tmk105bj104kv-f-30051094.pdf?src-supplier=Onlinecomponents.com, ComponentLink3URL=https://datasheet.ciiva.com/30051/25tmk105bj104kv-f-30051094.pdf?src-supplier=Onlinecomponents.com, ComponentLink4Description=https://datasheet.ciiva.com/15922/28tmk105bj104kv-f-15922315.pdf?src-supplier=Onlinecomponents.com, ComponentLink4URL=https://datasheet.ciiva.com/15922/28tmk105bj104kv-f-15922315.pdf?src-supplier=Onlinecomponents.com, ComponentLink5Description=https://datasheet.ciiva.com/131/tmk105bj104kv-f-ss-131420.pdf?src-supplier=Digi-Key, ComponentLink5URL=https://datasheet.ciiva.com/131/tmk105bj104kv-f-ss-131420.pdf?src-supplier=Digi-Key, ComponentLink6Description=https://datasheet.ciiva.com/22768/1693457-22768649.pdf?src-supplier=Farnell, ComponentLink6URL=https://datasheet.ciiva.com/22768/1693457-22768649.pdf?src-supplier=Farnell, Dielectric Material=Ceramic, Height=0.5mm, JESD-609 Code=e3, Length=1mm, Mount="Surface Mount", Multilayer=Yes, Number of Pins=2, Packaging="Tape and Reel", Positive Tolerance=10%, Pricing 1="1=0.10000, 10=0.04000, 50=0.02180, 100=0.01780, 500=0.01270, 1000=0.00998, 2500=0.00908, 5000=0.00835 (USD)", RoHS=Yes, Size Code=0402, Stock 1=17621987, Supplier 1=Digi-Key, Terminal Finish=Nickel, Termination=Wraparound, Width=0.5mm
C11: library part C-0402(1005), "Ceramic Capacitor, Multilayer, Ceramic, 50V, 10% +Tol, 10% -Tol, C0G, 30ppm/Cel TC, 0.0000005uF, Surface Mount, 0402", Case Code (Imperial)=0402, Case Code (Metric)=1005, Dielectric=C0G, Manufacturer=Murata, Manufacturer Part Number=GJM1555C1HR50WB01D, Max Operating Temperature=125°C, Min Operating Temperature=-55°C, Package Quantity=10000, Supplier Part Number 1=490-11250-1-ND, Voltage=50V, Capacitance=0.5pF, Case/Package=0402, Category="Ceramic Capacitors", ComponentLink1Description=https://datasheet.ciiva.com/169/product-169683.pdf, ComponentLink1URL=https://datasheet.ciiva.com/169/product-169683.pdf, ComponentLink2Description=https://datasheet.ciiva.com:443/pdfs/VipMasterIC/IC/MURE/MURE-S-A0004378008/MURE-S-A0004383131-1.pdf?src-supplier=IHS+Markit, ComponentLink2URL=https://datasheet.ciiva.com:443/pdfs/VipMasterIC/IC/MURE/MURE-S-A0004378008/MURE-S-A0004383131-1.pdf?src-supplier=IHS+Markit, ComponentLink3Description=https://datasheet.ciiva.com/169/product-169683.pdf?src-supplier=Digi-Key, ComponentLink3URL=https://datasheet.ciiva.com/169/product-169683.pdf?src-supplier=Digi-Key, Depth=0.5mm, Height=0.5mm, Lead Free="Lead Free", Length=1mm, Mount="Surface Mount", Packaging="Tape and Reel", Pricing 1="1=0.30000, 10=0.20500, 100=0.11610, 500=0.08198, 1000=0.07173, 2500=0.06831, 5000=0.06319 (USD)", Radiation Hardening=No, RoHS=Yes, Stock 1=75988, Supplier 1=Digi-Key, Termination=SMD/SMT, Thickness=0.022inch, Voltage Rating=50V, Voltage Rating (DC)=50V, Width=0.02inch
C12: library part C-0402(1005), "Ceramic Capacitor, Multilayer, Ceramic, 50V, 5% +Tol, 5% -Tol, C0G, 30ppm/Cel TC, 0.000002uF, Surface Mount, 0402", Case Code (Imperial)=0402, Case Code (Metric)=1005, Dielectric=C0G, Manufacturer=Murata, Manufacturer Part Number=GJM1555C1H2R0BB01D, Max Operating Temperature=125°C, Min Operating Temperature=-55°C, Package Quantity=1, Supplier Part Number 1=490-8091-1-ND, Voltage Rating=50V, Capacitance=2pF, Case/Package=0402, Category="Ceramic Capacitors", ComponentLink1Description=https://datasheet.ciiva.com/169/product-169683.pdf, ComponentLink1URL=https://datasheet.ciiva.com/169/product-169683.pdf, ComponentLink2Description=https://datasheet.ciiva.com:443/pdfs/VipMasterIC/IC/MURE/MURE-S-A0008911154/MURE-S-A0008911197-1.pdf?src-supplier=IHS+Markit, ComponentLink2URL=https://datasheet.ciiva.com:443/pdfs/VipMasterIC/IC/MURE/MURE-S-A0008911154/MURE-S-A0008911197-1.pdf?src-supplier=IHS+Markit, ComponentLink3Description=https://datasheet.ciiva.com/5694/1700193-5694978.pdf?src-supplier=Farnell, ComponentLink3URL=https://datasheet.ciiva.com/5694/1700193-5694978.pdf?src-supplier=Farnell, ComponentLink4Description=https://datasheet.ciiva.com/17453/product-17453487.pdf?src-supplier=Avnet+Europe, ComponentLink4URL=https://datasheet.ciiva.com/17453/product-17453487.pdf?src-supplier=Avnet+Europe, ComponentLink5Description=https://datasheet.ciiva.com/16440/l0005e-16440476.pdf?src-supplier=Future+Electronics, ComponentLink5URL=https://datasheet.ciiva.com/16440/l0005e-16440476.pdf?src-supplier=Future+Electronics, Depth=0.5mm, Height=0.5mm, Lead Free="Lead Free", Lead Pitch=0.3mm, Length=1mm, Mount="Surface Mount", Number of Pins=2, Packaging="Tape and Reel", Pricing 1="1=0.19000, 10=0.13000, 100=0.06590, 500=0.04508, 1000=0.03987, 2500=0.03814, 5000=0.03467 (USD)", Radiation Hardening=No, REACH SVHC="No SVHC", RoHS=Yes, Stock 1=969, Supplier 1=Digi-Key, Termination=SMD/SMT, Thickness=0.022inch, Voltage Rating (DC)=50V, Width=0.5mm
C22: library part C-0402(1005), "Ceramic Capacitor, Multilayer, Ceramic, 50V, 1% +Tol, 1% -Tol, C0G, -/+30ppm/Cel TC, 0.000015uF, Surface Mount, 0402", Case Code (Imperial)=0402, Case Code (Metric)=1005, Dielectric=C0G, Manufacturer=Murata, Manufacturer Part Number=GJM1555C1H150FB01D, Max Operating Temperature=125°C, Min Operating Temperature=-55°C, Package Quantity=10000, Supplier Part Number 1=490-11191-1-ND, Tolerance=1%, Voltage=50V, Capacitance=15pF, Case/Package=0402, Category="Ceramic Capacitors", ComponentLink1Description=https://datasheet.ciiva.com/169/product-169683.pdf, ComponentLink1URL=https://datasheet.ciiva.com/169/product-169683.pdf, ComponentLink2Description=https://datasheet.ciiva.com:443/pdfs/VipMasterIC/IC/MURE/MURE-S-A0004383799/MURE-S-A0004384018-1.pdf?src-supplier=IHS+Markit, ComponentLink2URL=https://datasheet.ciiva.com:443/pdfs/VipMasterIC/IC/MURE/MURE-S-A0004383799/MURE-S-A0004384018-1.pdf?src-supplier=IHS+Markit, ComponentLink3Description=https://datasheet.ciiva.com/11608/c02e-11608383.pdf?src-supplier=Avnet, ComponentLink3URL=https://datasheet.ciiva.com/11608/c02e-11608383.pdf?src-supplier=Avnet, Depth=0.5mm, Height=0.5mm, Length=1mm, Mount="Surface Mount", Packaging="Tape and Reel", Pricing 1="1=0.24000, 10=0.16700, 50=0.10000, 100=0.08440, 500=0.05778, 1000=0.05111, 2500=0.04888, 5000=0.04444 (USD)", Radiation Hardening=No, RoHS=Yes, Stock 1=66158, Supplier 1=Digi-Key, Termination=SMD/SMT, Thickness=0.022inch, Voltage Rating=50V, Voltage Rating (DC)=50V, Width=0.02inch
C31 C34 C37 C43 C44: library part C-0402(1005), "Ceramic Capacitor, Non-polarized, Multilayer, Ceramic, 10V, 20% +Tol, 20% -Tol, X5R, 15% TC, 10uF, Surface Mount, 0402", Capacitor Type=Ceramic, Manufacturer="Kyocera AVX", Manufacturer Part Number=0402ZD106MAT2A, Max Operating Temperature=85°C, Min Operating Temperature=-55°C, Negative Tolerance=20%, Package Shape=Rectangular, Rated DC Voltage (URdc)=10V, Supplier Part Number 1=478-10052-1-ND, Temperature Characteristics Code=X5R, Capacitance=10uF, Category="Ceramic Capacitors", ComponentLink1Description=https://datasheet.ciiva.com/169/product-169683.pdf, ComponentLink1URL=https://datasheet.ciiva.com/169/product-169683.pdf, ComponentLink2Description=https://datasheet.ciiva.com:443/pdfs/VipMasterIC/IC/AVXC/AVXC-S-A0009640604/AVXC-S-A0009640604-1.pdf?src-supplier=IHS+Markit, ComponentLink2URL=https://datasheet.ciiva.com:443/pdfs/VipMasterIC/IC/AVXC/AVXC-S-A0009640604/AVXC-S-A0009640604-1.pdf?src-supplier=IHS+Markit, ComponentLink3Description=http://datasheets.avx.com/cx5r.pdf?src-supplier=Digi-Key, ComponentLink3URL=http://datasheets.avx.com/cx5r.pdf?src-supplier=Digi-Key, ComponentLink4Description=http://catalogs.avx.com/SurfaceMount.pdf?src-supplier=Digi-Key, ComponentLink4URL=http://catalogs.avx.com/SurfaceMount.pdf?src-supplier=Digi-Key, Dielectric Material=Ceramic, JESD-609 Code=e3, Mount="Surface Mount", Multilayer=Yes, Number of Pins=2, Packaging="Tape and Reel", Positive Tolerance=20%, Pricing 1="1=0.85000, 10=0.62400, 50=0.49900, 100=0.42770, 500=0.33858, 1000=0.28512, 2500=0.26730, 5000=0.24948 (USD)", RoHS=No, Size Code=0402, Stock 1=111382, Supplier 1=Digi-Key, Terminal Finish=Nickel, Termination=Wraparound
C32: library part C-0402(1005), "Ceramic Capacitor, Multilayer, Ceramic, 10V, 5% +Tol, 5% -Tol, C0G, -/+30ppm/Cel TC, 0.001uF, 0402", Case Code (Imperial)=0402, Case Code (Metric)=1005, Manufacturer=KEMET, Manufacturer Part Number=C0402C102J8GAC7867, Max Operating Temperature=125°C, Min Operating Temperature=-55°C, Supplier Part Number 1=399-14868-1-ND, Tolerance=5%, Voltage Rating=10V, Capacitance=1nF, Case/Package=0402, Category="Ceramic Capacitors", ComponentLink1Description=https://datasheet.ciiva.com/169/product-169683.pdf, ComponentLink1URL=https://datasheet.ciiva.com/169/product-169683.pdf, ComponentLink2Description=https://datasheet.ciiva.com:443/pdfs/VipMasterIC/IC/KEME/KEMES02331/KEMES02331-1.pdf?src-supplier=IHS+Markit, ComponentLink2URL=https://datasheet.ciiva.com:443/pdfs/VipMasterIC/IC/KEME/KEMES02331/KEMES02331-1.pdf?src-supplier=IHS+Markit, ComponentLink3Description=https://api.kemet.com/component-edge/download/datasheet/C0402C102J8GAC7867.pdf?src-supplier=Digi-Key, ComponentLink3URL=https://api.kemet.com/component-edge/download/datasheet/C0402C102J8GAC7867.pdf?src-supplier=Digi-Key, Mount="Surface Mount", Packaging="Tape and Reel", Pricing 1="1=0.26000, 10=0.18100, 100=0.10240, 500=0.07226, 1000=0.06322, 2500=0.06022, 5000=0.05570 (USD)", RoHS=No, Stock 1=20757, Supplier 1=Digi-Key
C45: library part C-0402(1005), "Ceramic Capacitor, Multilayer, Ceramic, 25V, 5% +Tol, 5% -Tol, X7R, 15% TC, 0.01uF, Surface Mount, 0402", Case Code (Imperial)=0402, Case Code (Metric)=1005, Dielectric=X7R, Manufacturer=Yageo, Manufacturer Part Number=CC0402JRX7R8BB103, Max Operating Temperature=125°C, Min Operating Temperature=-55°C, Supplier Part Number 1=311-1677-1-ND, Tolerance=5%, Voltage Rating=25V, Capacitance=10nF, Case/Package=0402, Category="Ceramic Capacitors", ComponentLink1Description=https://datasheet.ciiva.com/169/product-169683.pdf, ComponentLink1URL=https://datasheet.ciiva.com/169/product-169683.pdf, ComponentLink2Description=https://datasheet.ciiva.com:443/pdfs/VipMasterIC/IC/YAGO/YAGO-S-A0003557223/YAGO-S-A0003557223-1.pdf?src-supplier=IHS+Markit, ComponentLink2URL=https://datasheet.ciiva.com:443/pdfs/VipMasterIC/IC/YAGO/YAGO-S-A0003557223/YAGO-S-A0003557223-1.pdf?src-supplier=IHS+Markit, ComponentLink3Description=https://datasheet.ciiva.com/13208/upy-gphc-x7r-6-3v-to-50v-8-12304-13208812.pdf?src-supplier=Mouser, ComponentLink3URL=https://datasheet.ciiva.com/13208/upy-gphc-x7r-6-3v-to-50v-8-12304-13208812.pdf?src-supplier=Mouser, ComponentLink4Description=https://datasheet.ciiva.com/17434/upy-gphc-x7r-6-3v-to-50v-8-17434365.pdf?src-supplier=Avnet+Europe, ComponentLink4URL=https://datasheet.ciiva.com/17434/upy-gphc-x7r-6-3v-to-50v-8-17434365.pdf?src-supplier=Avnet+Europe, Composition=Ceramic, Depth=0.5mm, Halogen Free="Halogen Free", Height=0.5mm, Lead Free="Lead Free", Length=1mm, Mount="Surface Mount", Packaging="Tape and Reel", Pricing 1="1=0.10000, 10=0.04200, 100=0.01890, 500=0.01348, 1000=0.01059, 2500=0.00962, 5000=0.00886 (USD)", Radiation Hardening=No, RoHS=Yes, Stock 1=22771, Supplier 1=Digi-Key, Termination=SMD/SMT, Thickness=0.022inch, Voltage Rating (DC)=25V, Weight=2.3E-05oz, Width=0.02inch
C46 C57: library part C-0402(1005), "Ceramic Capacitor, Multilayer, Ceramic, 25V, 20% +Tol, 20% -Tol, X5R, 15% TC, 0.47uF, Surface Mount, 0402", Case Code (Imperial)=0402, Case Code (Metric)=1005, Manufacturer=Murata, Manufacturer Part Number=GRT155R61E474ME01D, Max Operating Temperature=85°C, Min Operating Temperature=-55°C, Ratings=AEC-Q200, Supplier Part Number 1=490-12270-1-ND, Tolerance=20%, Voltage Rating=25V, Capacitance=470nF, Case/Package=0402, Category="Ceramic Capacitors", ComponentLink1Description=https://datasheet.ciiva.com/169/product-169683.pdf, ComponentLink1URL=https://datasheet.ciiva.com/169/product-169683.pdf, ComponentLink2Description=https://datasheet.ciiva.com:443/pdfs/VipMasterIC/IC/MURE/MURE-S-A0004410517/MURE-S-A0004410723-1.pdf?src-supplier=IHS+Markit, ComponentLink2URL=https://datasheet.ciiva.com:443/pdfs/VipMasterIC/IC/MURE/MURE-S-A0004410517/MURE-S-A0004410723-1.pdf?src-supplier=IHS+Markit, ComponentLink3Description=http://search.murata.co.jp/Ceramy/image/img/A01X/G101/ENG/GRT155R61E474ME01-01.pdf?src-supplier=Digi-Key, ComponentLink3URL=http://search.murata.co.jp/Ceramy/image/img/A01X/G101/ENG/GRT155R61E474ME01-01.pdf?src-supplier=Digi-Key, Length=0.039inch, Mount="Surface Mount", Packaging="Tape and Reel", Pricing 1="1=0.12000, 10=0.08400, 100=0.03930, 500=0.02754, 1000=0.02280, 2500=0.02122, 5000=0.01941 (USD)", RoHS=Yes, Stock 1=59550, Supplier 1=Digi-Key, Thickness=0.022inch, Width=0.02inch
C48 C56: library part C-0402(1005), "Ceramic Capacitor, Multilayer, Ceramic, 25V, 10% +Tol, 10% -Tol, X7R, 15% TC, 0.022uF, Surface Mount, 0402", Case Code (Imperial)=0402, Case Code (Metric)=1005, Dielectric=X7R, Manufacturer=Murata, Manufacturer Part Number=GRM155R71E223KA61D, Max Operating Temperature=125°C, Min Operating Temperature=-55°C, Package Quantity=1, Supplier Part Number 1=490-3252-1-ND, Tolerance=10%, Voltage=25V, Capacitance=22nF, Case/Package=0402, Category="Ceramic Capacitors", ComponentLink1Description=https://datasheet.ciiva.com/169/product-169683.pdf, ComponentLink1URL=https://datasheet.ciiva.com/169/product-169683.pdf, ComponentLink2Description=https://datasheet.ciiva.com:443/pdfs/VipMasterIC/IC/MURE/MURE-S-A0004362469/MURE-S-A0004364485-1.pdf?src-supplier=IHS+Markit, ComponentLink2URL=https://datasheet.ciiva.com:443/pdfs/VipMasterIC/IC/MURE/MURE-S-A0004362469/MURE-S-A0004364485-1.pdf?src-supplier=IHS+Markit, ComponentLink3Description=https://datasheet.ciiva.com/131/product-131108.pdf?src-supplier=Digi-Key, ComponentLink3URL=https://datasheet.ciiva.com/131/product-131108.pdf?src-supplier=Digi-Key, ComponentLink4Description=https://datasheet.ciiva.com/131/grm155r71e223ka61-01-131110.pdf?src-supplier=Digi-Key, ComponentLink4URL=https://datasheet.ciiva.com/131/grm155r71e223ka61-01-131110.pdf?src-supplier=Digi-Key, ComponentLink5Description=https://datasheet.ciiva.com/18184/getdatasheetpartid-178879-18184701.pdf?src-supplier=Verical, ComponentLink5URL=https://datasheet.ciiva.com/18184/getdatasheetpartid-178879-18184701.pdf?src-supplier=Verical, ComponentLink6Description=https://datasheet.ciiva.com/14103/grmseries-highdielectrictype-eng-14103752.pdf?src-supplier=Distrelec, ComponentLink6URL=https://datasheet.ciiva.com/14103/grmseries-highdielectrictype-eng-14103752.pdf?src-supplier=Distrelec, ComponentLink7Description=https://datasheet.ciiva.com/5414/product-5414091.pdf?src-supplier=Mouser, ComponentLink7URL=https://datasheet.ciiva.com/5414/product-5414091.pdf?src-supplier=Mouser, ComponentLink8Description=https://datasheet.ciiva.com/16396/product-16396813.pdf?src-supplier=Future+Electronics, ComponentLink8URL=https://datasheet.ciiva.com/16396/product-16396813.pdf?src-supplier=Future+Electronics, ComponentLink9Description=https://datasheet.ciiva.com/2989/product-2989390.pdf?src-supplier=Avnet, ComponentLink9URL=https://datasheet.ciiva.com/2989/product-2989390.pdf?src-supplier=Avnet, Depth=0.5mm, Height=0.5mm, Lead Free="Lead Free", Length=1mm, Mount="Surface Mount", Packaging="Tape and Reel", Pricing 1="1=0.10000, 10=0.05800, 100=0.02600, 500=0.01860, 1000=0.01461, 2500=0.01328, 5000=0.01222 (USD)", Radiation Hardening=No, REACH SVHC="No SVHC", RoHS=Yes, Stock 1=465669, Supplier 1=Digi-Key, Termination=SMD/SMT, Thickness=0.022inch, Voltage Rating=25V, Voltage Rating (DC)=25V, Width=0.02inch
C50 C55: library part C-0402(1005), "Ceramic Capacitor, Multilayer, Ceramic, 25V, 5% +Tol, 5% -Tol, X7R, 15% TC, 0.01uF, Surface Mount, 0402", Case Code (Imperial)=0402, Case Code (Metric)=1005, Dielectric=X7R, Dielectric Material=Ceramic, Manufacturer=KEMET, Manufacturer Part Number=C0402C103J3RACTU, Max Operating Temperature=125°C, Min Operating Temperature=-55°C, Package Quantity=1, Supplier Part Number 1=399-1279-1-ND, Tolerance=5%, Voltage=25V, Capacitance=10nF, Case/Package=0402, Category="Ceramic Capacitors", ComponentLink1Description=https://datasheet.ciiva.com/169/product-169683.pdf, ComponentLink1URL=https://datasheet.ciiva.com/169/product-169683.pdf, ComponentLink2Description=https://datasheet.ciiva.com:443/pdfs/VipMasterIC/IC/KEME/KEME-S-A0008991654/KEME-S-A0008991654-1.pdf?src-supplier=IHS+Markit, ComponentLink2URL=https://datasheet.ciiva.com:443/pdfs/VipMasterIC/IC/KEME/KEME-S-A0008991654/KEME-S-A0008991654-1.pdf?src-supplier=IHS+Markit, ComponentLink3Description=https://datasheet.ciiva.com/7747/1732724-7747610.pdf?src-supplier=Element14, ComponentLink3URL=https://datasheet.ciiva.com/7747/1732724-7747610.pdf?src-supplier=Element14, ComponentLink4Description=https://datasheet.ciiva.com/14603/70095383-14603973.pdf?src-supplier=Allied+Electronics, ComponentLink4URL=https://datasheet.ciiva.com/14603/70095383-14603973.pdf?src-supplier=Allied+Electronics, ComponentLink5Description=https://datasheet.ciiva.com/14607/70095383-14607438.pdf?src-supplier=Allied+Electronics, ComponentLink5URL=https://datasheet.ciiva.com/14607/70095383-14607438.pdf?src-supplier=Allied+Electronics, Depth=0.5mm, Dissipation Factor=3.5%, Height=0.5mm, Lead Pitch=0.3mm, Length=1mm, Mount="Surface Mount,PCB", Number of Pins=2, Packaging="Tape and Reel", Pricing 1="1=0.10000, 10=0.05300, 100=0.02360, 500=0.01682, 1000=0.01322, 2500=0.01202, 5000=0.01106 (USD)", Radiation Hardening=No, REACH SVHC="No SVHC", RoHS=Yes, Stock 1=2324889, Supplier 1=Digi-Key, Termination=SMD/SMT, Thickness=0.022inch, Voltage Rating=25V, Voltage Rating (DC)=25V, Width=0.02inch